# Altium PCB interface-board.PcbDoc
Units mm, origin at the board's own origin, x right, y up, seen from the top; angles counter-clockwise.
Board outline 50 x 50 mm, 2 copper layers (Top Layer, Bottom Layer), stack 1.569 mm thick; 45 components, 35 nets, 147 pads, 411 vias.
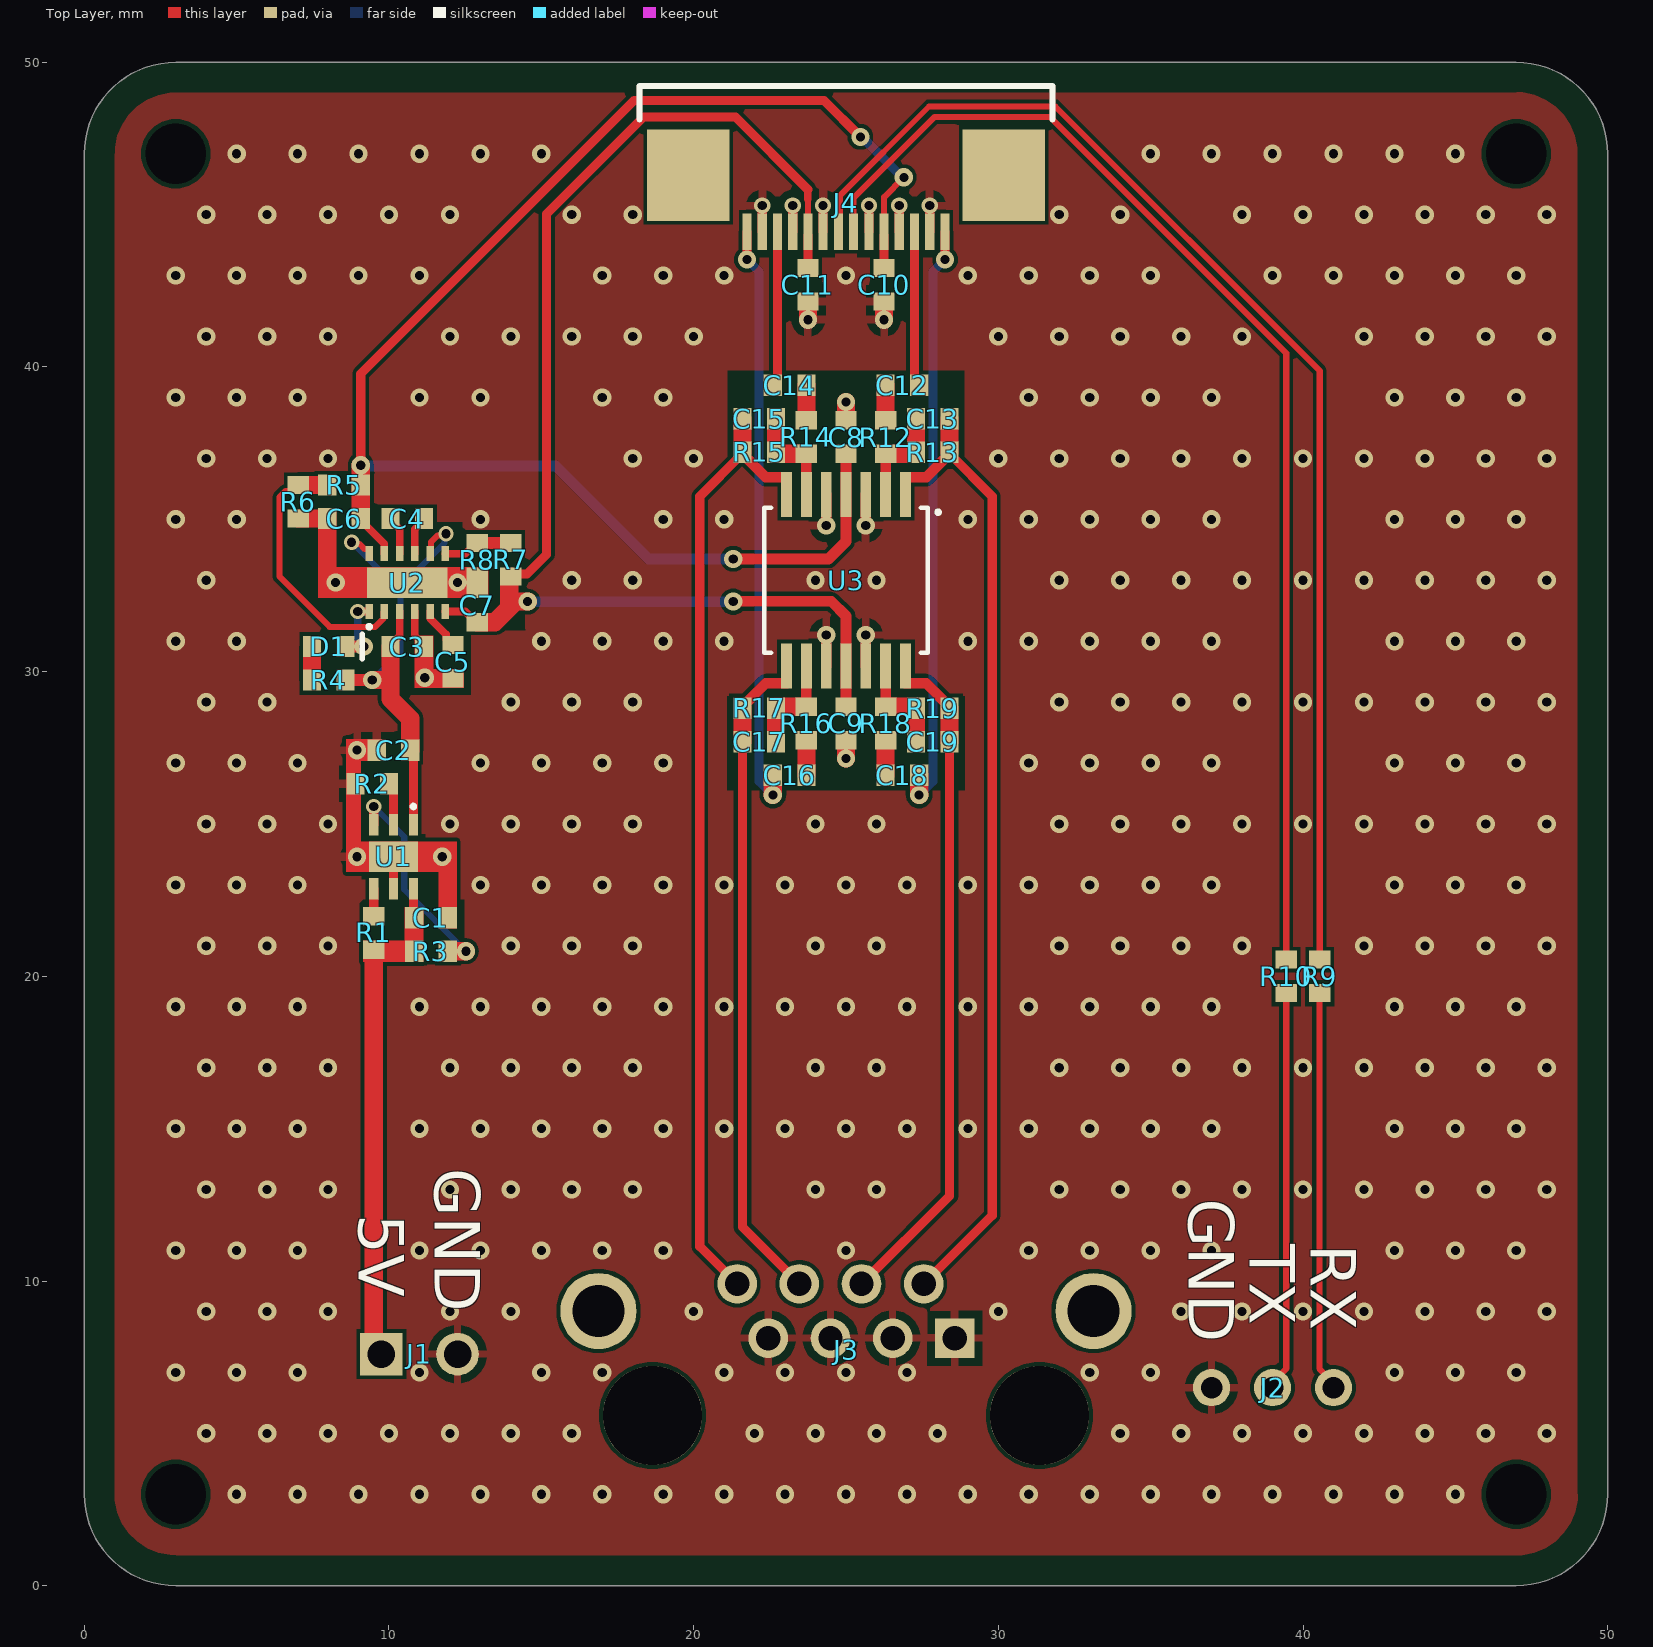
[diagram p0: Top Layer view]
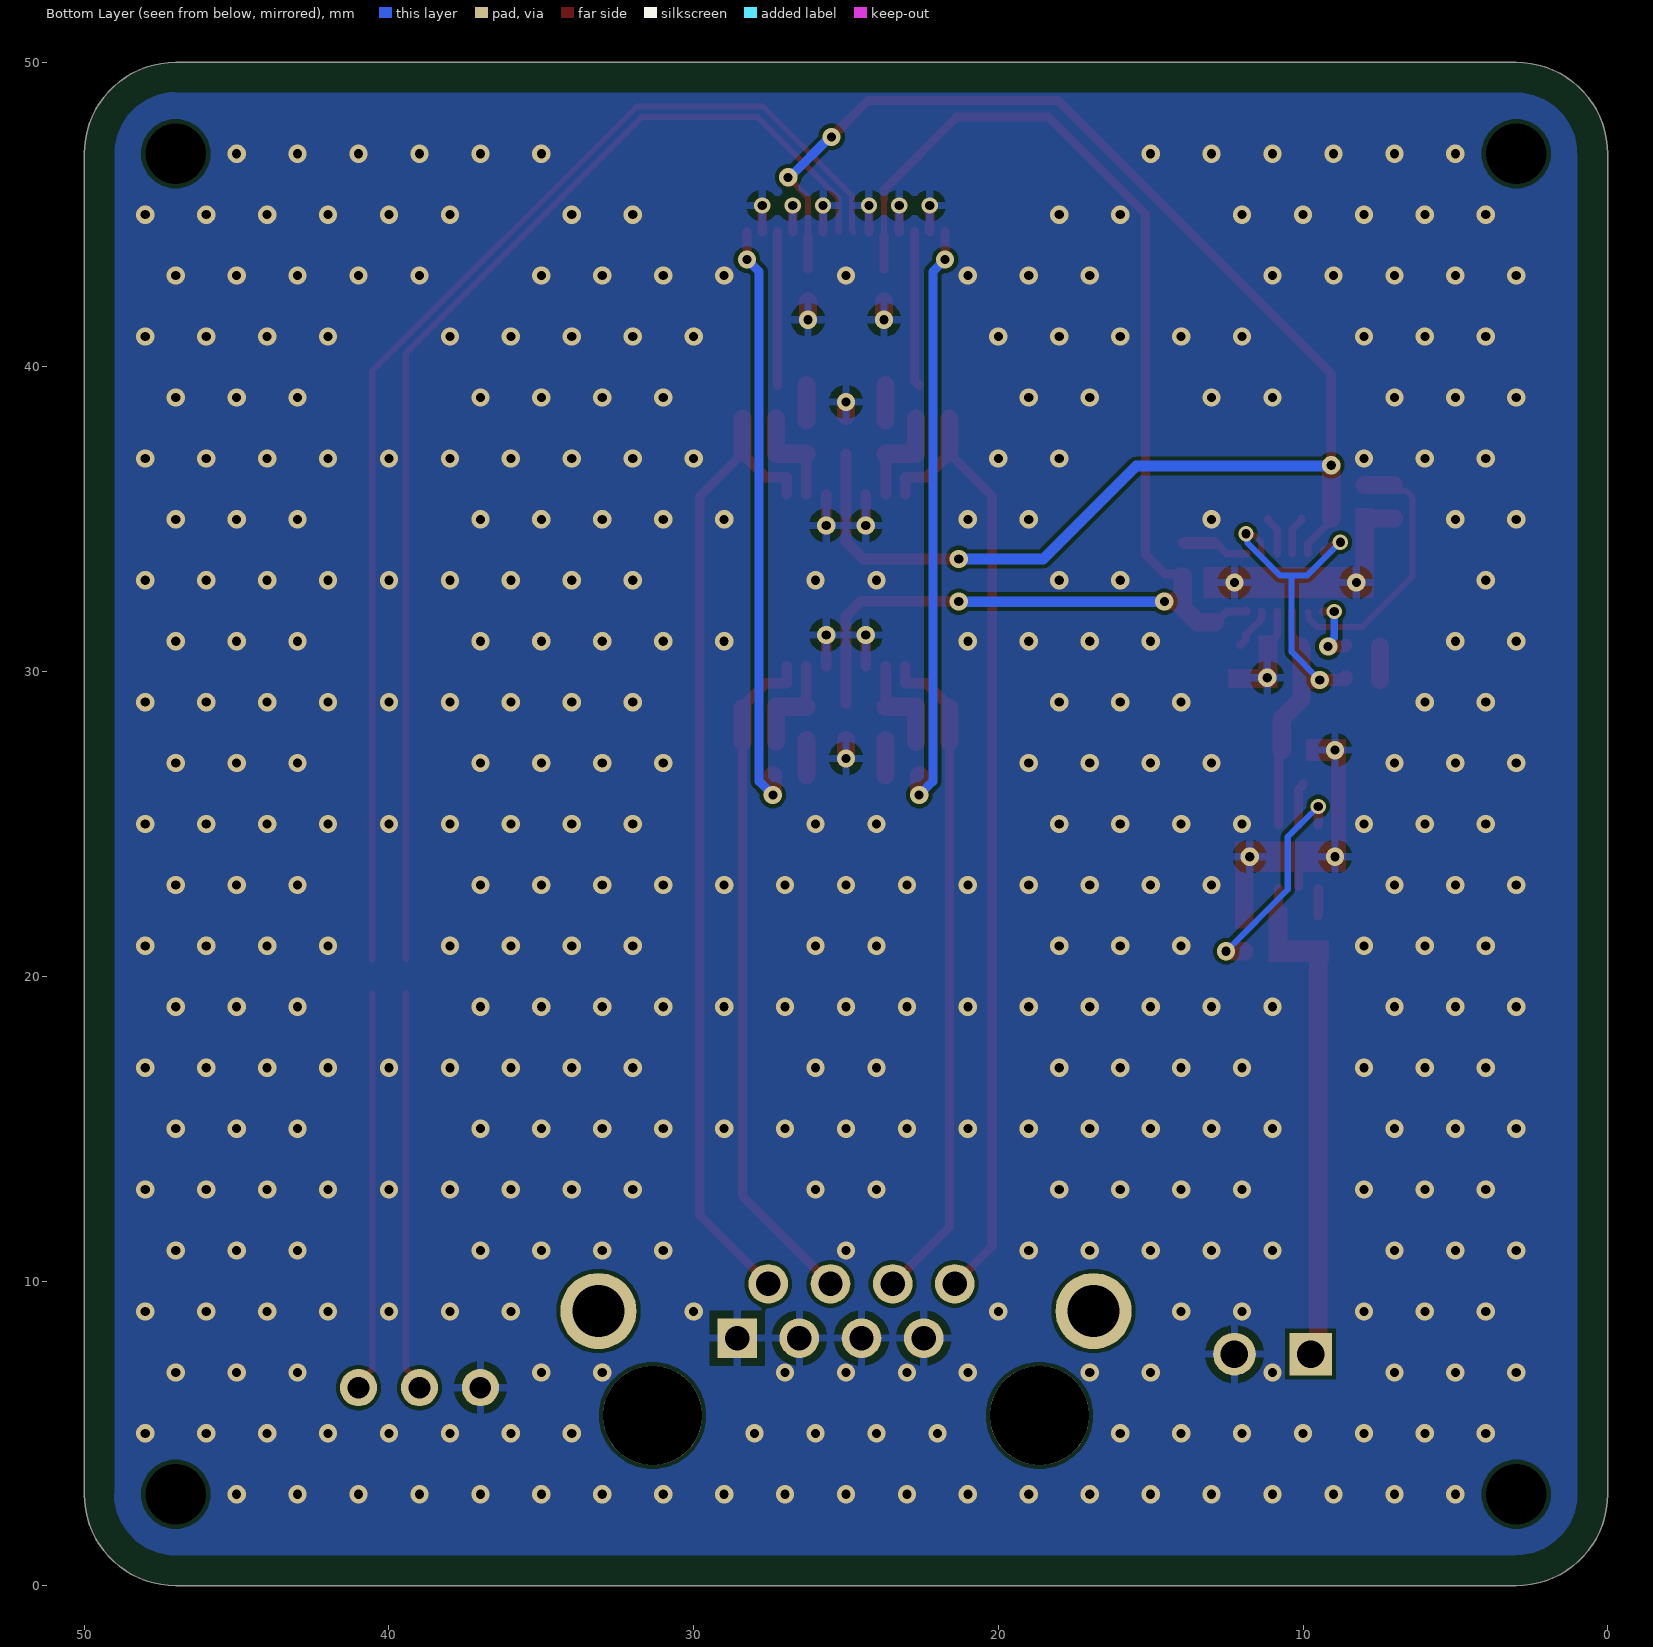
[diagram p1: Bottom Layer view, seen from below]
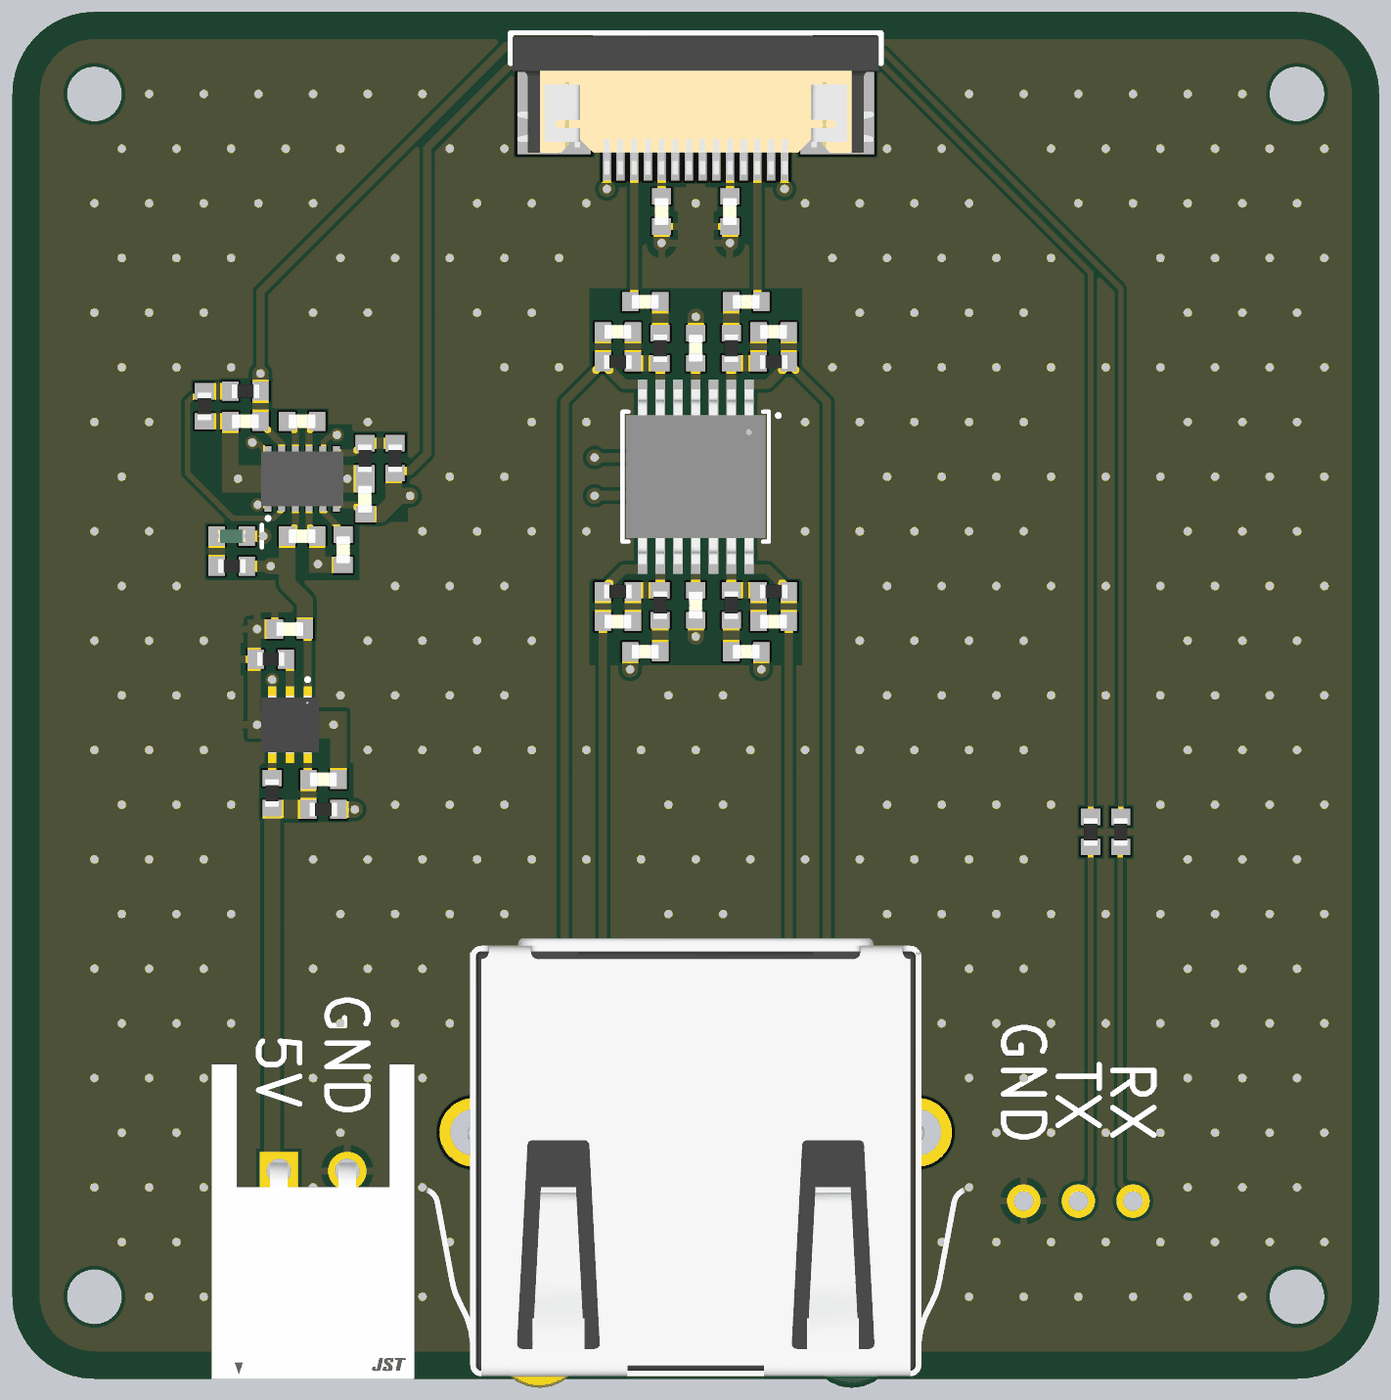
[diagram p2: 3D render of the assembled board from above, using the file's embedded part models]

## Layer stack, top to bottom
Top Solder: solder mask 0.0254, SM-001, Dk 4
Top Layer: signal copper 0.035
Dielectric 1: core 1.4986, Core-043, Dk 4.3
Bottom Layer: signal copper 0.035
Bottom Solder: solder mask 0.0254, SM-001, Dk 4

## Board outline
0,3 0,47 cw(c3,47) 3,50 47,50 cw(c47,47) 50,47 50,3 cw(c47,3) 47,0 3,0 cw(c3,3)

## Design rules (kind name [scope] priority, off if disabled: settings)
Clearance [All] p1: gap=0.127 ignorepadtopadclearanceinfootprint=FALSE
HoleSize [All] p1: absolutevalues=TRUE maxlimit=5 minlimit=0.2 maxpercent=80.000 minpercent=20.000
MinimumSolderMaskSliver [All] p1: minsoldermaskwidth=0.102
PolygonConnect [All] p1: connectstyle=Relief reliefconductorwidth=0.254 reliefentries=4 polygonreliefangle="90 Angle" airgapwidth=0.254
RoutingVias [All] p1: holewidth=0.3 width=0.6 viastyle="Through Hole" minholewidth=0.2 minwidth=0.4 maxholewidth=0.711 maxwidth=1.27
SilkToSilkClearance [All] p1: silktosilkclearance=0.075
SilkToSolderMaskClearance [IsPad] p1: minsilkscreentomaskgap=0.1 clearancetoexposedcopper=TRUE
SolderMaskExpansion SolderMaskExpansion_Via [IsVia] p1: expansion=0.102 istentingtop=TRUE
SolderMaskExpansion [All] p2: expansion=0.102 istentingtop=FALSE
Width [All] p1: maxlimit=0.7 minlimit=0.1 preferedwidth=0.2
26 further rules are at their usual default settings.

## Components (designator, comment, footprint, x,y, rotation, side; value= is the part's Value field where it differs from the comment)
C1 "0u1" CAP_0402 11.375,21.925 r180 top
C2 "2u2" CAP_0402 10.15,27.425 r0 top
C3 "2u2" CAP_0402 10.6,30.825 r180 top
C4 "470n" CAP_0402 10.6,35.025 r0 top
C5 "4u7" CAP_0402 12.1,30.325 r90 top
C6 "2u2" CAP_0402 8.525,35.025 r0 top
C7 "2u2" CAP_0402 12.9,32.175 r90 top
C8 "0u1" CAP_0402 25,37.7 r270 top
C9 "0u1" CAP_0402 25,28.3 r90 top
C10 "2u2" CAP_0402 26.25,42.7 r270 top
C11 "2u2" CAP_0402 23.75,42.7 r270 top
C12 "820n" CAP_0402 26.85,39.4 r180 top
C13 "1p" CAP_0402 27.85,38.3 r180 top
C14 "820n" CAP_0402 23.15,39.4 r0 top
C15 "1p" CAP_0402 22.15,38.3 r0 top
C16 "820n" CAP_0402 23.15,26.6 r0 top
C17 "1p" CAP_0402 22.15,27.7 r0 top
C18 "820n" CAP_0402 26.85,26.6 r180 top
C19 "1p" CAP_0402 27.85,27.7 r180 top
D1 "LED_0402" LED_0402 8.025,30.825 r0 top
J1 "XH_2.54_2P" XH_2.54_2P 11,5.75 r180 top
J2 "PH_2.0_3P" PH_2.0_3P 39,6.5 r0 top
J3 "RJ45" RJ45 25,8 r0 top
J4 "FPC_0.5_14P" FPC_0.5_14P 25,47 r180 top
R1 "300k" RES_0402 9.5,21.425 r270 top
R2 "150k" RES_0402 9.45,26.325 r0 top
R3 "300k" RES_0402 11.375,20.825 r180 top
R4 "20k" RES_0402 8.025,29.725 r0 top
R5 "1.6M" RES_0402 8.525,36.125 r0 top
R6 "510k" RES_0402 7.025,35.575 r90 top
R7 "1.6M" RES_0402 14,33.675 r90 top
R8 "523k" RES_0402 12.9,33.675 r270 top
R9 "22R" RES_0402 40.55,20 r270 top
R10 "22" RES_0402 39.45,20 r270 top
R12 "1k" RES_0402 26.3,37.7 r90 top
R13 "100k" RES_0402 27.85,37.2 r180 top
R14 "1k" RES_0402 23.7,37.7 r90 top
R15 "100k" RES_0402 22.15,37.2 r0 top
R16 "1k" RES_0402 23.7,28.3 r270 top
R17 "100k" RES_0402 22.15,28.8 r0 top
R18 "1k" RES_0402 26.3,28.3 r270 top
R19 "100k" RES_0402 27.85,28.8 r180 top
U1 "TPS25200" TPS25200 10.15,23.925 r270 top
U2 "LM27762" LM27762 10.6,32.925 r90 top
U3 "ADA4084-4" ADA4084-4 25,33 r270 top

## Footprints (in the part's own frame and the unit in brackets; to place one, negate y for a bottom-side part, rotate by r counter-clockwise, add the part's x,y. Pads: shape width x height; smd on the part's side, far side on the other; paste and mask are expansions set on the pad)
ADA4084-4 [mil]
  rect 58x14 smd paste+0 mask+0: 1(-111,76.77) 2(-111,51.18) 3(-111,25.59) 4(-111,0) 5(-111,-25.59) 6(-111,-51.18) 7(-111,-76.77) 8(111,-76.77) 9(111,-51.18) 10(111,-25.59) 11(111,0) 12(111,25.59) 13(111,51.18) 14(111,76.77)
  silkscreen extent -94,-106 94,121, body extent -126,-101 126,101, height 47
CAP_0402 [mm]
  rect 0.6x0.7 smd mask+0.076: 1(-0.55,0) 2(0.55,0)
  body extent -0.5,-0.26 0.5,0.26, height 0.37
FPC_0.5_14P [mm]
  rect 0.3x1.2 smd: 1(-3.25,2.56) 2(-2.75,2.56) 3(-2.25,2.56) 4(-1.75,2.56) 5(-1.25,2.56) 6(-0.75,2.56) 7(-0.25,2.56) 8(0.25,2.56) 9(0.75,2.56) 10(1.25,2.56) 11(1.75,2.56) 12(2.25,2.56) 13(2.75,2.56) 14(3.25,2.56)
  rect 2.7x3 smd: MP1(-5.18,0.7) MP2(5.18,0.7)
  silkscreen extent -6.77,-2.22 6.78,-1.12, body extent -6.7,-2.15 6.7,2.95, height 2.1
LED_0402 [mm]
  rect 0.6x0.7 smd mask+0.076: A(-0.55,0) K(0.55,0)
  silkscreen extent 1.1,-0.4 1.1,0.4, body extent -0.51,-0.25 0.51,0.25, height 0.45
LM27762 [mm]
  rect 0.5x0.25 smd paste+0 mask+0.05: 1(-0.95,1.25) 2(-0.95,0.75) 3(-0.95,0.25) 4(-0.95,-0.25) 5(-0.95,-0.75) 6(-0.95,-1.25) 7(0.95,-1.25) 8(0.95,-0.75) 9(0.95,-0.25) 10(0.95,0.25) 11(0.95,0.75) 12(0.95,1.25)
  rect 1x2.65 smd paste-0.5 mask+0.048: 13(0,0)
  silkscreen extent -1.5,1.2 -1.4,1.3, body extent -1,-1.5 1,1.5, height 0.8
PH_2.0_3P [mil]
  round 48 / inner round 60 / far side round 48 hole 28 paste-24 mask+0: 1(-78.74,0) 2(0,0) 3(78.74,0)
RES_0402 [mm]
  rect 0.6x0.7 smd mask+0.076: 1(-0.55,0) 2(0.55,0)
  body extent -0.5,-0.25 0.5,0.25, height 0.3
RJ45 [mm]
  rect 1.3x1.3 hole 0.8: 1(3.57,0.125)
  round 1.3 hole 0.8: 2(2.55,1.905) 3(1.53,0.125) 4(0.51,1.905) 5(-0.51,0.125) 6(-1.53,1.905) 7(-2.55,0.125) 8(-3.57,1.905)
  round 3.25 hole 3.25 unplated: MH1(-6.35,-2.415) MH2(6.35,-2.415)
  round 2.5 hole 1.7: S1(-8.125,1.015) S2(8.125,1.015)
  body extent -9.88,-8.33 9.88,8.12, height 15.13
TPS25200 [mm]
  rect 0.7x0.3 smd paste-0.15 mask+0: 1(-1.05,0.65) 2(-1.05,0) 3(-1.05,-0.65) 4(1.05,-0.65) 5(1.05,0) 6(1.05,0.65)
  rect 1.016x1.6 smd paste-0.787 mask-0.787: 7(0,0)
  Top Layer region: 0,0.8 0,0.8 0,0.8 0,0.8 0,0.8 0,0.8 0,0.8 0,0.8
  Top Layer region: 0,-0.8 0,-0.8 0,-0.8 0,-0.8 0,-0.8 0,-0.8 0,-0.8 0,-0.8
  silkscreen extent -1.7,0.6 -1.6,0.7, body extent -1.05,-1.05 1.05,1.05, height 0.81
XH_2.54_2P [mm]
  rect 1.4x1.4 hole 0.9 paste-1000 mask+0: 1(1.25,-1.85)
  round 1.4 hole 0.9 paste-1000 mask+0: 2(-1.25,-1.85)
  body extent -3.8,-5.85 3.8,5.85, height 0.25

## Part data
C1 C2 C3 C4 C5 C6 C7 C8 C9 C10 C11 C12 C13 C14 C15 C16 C17 C18 C19: library part CAP_0402, "Capacitor SMD 0402", Voltage=50V
  C1 C8 C9: Capacitance=0u1
  C2 C3 C6 C7 C10 C11: Capacitance=2u2
  C4: Capacitance=470n
  C5: Capacitance=4u7
  C12 C14 C16 C18: Capacitance=820n
  C13 C15 C17 C19: Capacitance=1p
D1: "LED SMD 0402"
J1: "XH, pitch 2.54 mm, 2 pisition"
J2: "PH, pitch 2.0 mm, 3 pisition"
J4: "FPC, Horizontal, pitch 0.5 mm, 14 pins"
R1 R2 R3 R4 R5 R6 R7 R8 R9 R10 R12 R13 R14 R15 R16 R17 R18 R19: library part RES_0402, "Resistor SMD 0402"
  R1 R3: Resistance=300k
  R2: Resistance=150k
  R4: Resistance=20k
  R5 R7: Resistance=1.6M
  R6: Resistance=510k
  R8: Resistance=523k
  R9: Resistance=22R
  R10: Resistance=22
  R12 R14 R16 R18: Resistance=1k
  R13 R15 R17 R19: Resistance=100k
U1: "5-V eFuse With Precision Adjustable Current Limit and Overvoltage Clamp", Manufacturer_Part_Number=TPS25200DRVR, Mfr_Name="Texas Instruments", Copyright="Copyright (C) 2023 Ultra Librarian. All rights reserved.", RefDes=RefDes, Type=DEV
U2: "Low-Noise Positive and Negative Output Integrated Charge Pump Plus LDO", Manufacturer_Part_Number=LM27762DSSR, Mfr_Name="Texas Instruments", Copyright="Copyright (C) 2023 Ultra Librarian. All rights reserved.", Digi-Key_Part_Number_1=296-47331-1-ND, Digi-Key_Part_Number_2=296-47331-2-ND, Digi-Key_Part_Number_3=296-47331-6-ND, Digi-Key_Part_Number_4=2156-LM27762DSSR-ND, RefDes=RefDes, Type=DEV
U3: "30 V, Low Noise, Rail-to-Rail Input/Output, / Low Power Operational Amplifiers"

## Free pads (board coordinates)
  round 1.524 hole 2 unplated: 3(3,3) 3(3,47) 3(47,3) 3(47,47)

## Via types
v1: diameter 0.6, hole 0.3, Top Layer to Bottom Layer, tented both sides, 395 vias
v2: diameter 0.53, hole 0.3, Top Layer to Bottom Layer, tented both sides, 6 vias
v3: diameter 0.6, hole 0.3, Top Layer to Bottom Layer, 6 vias
v4: diameter 0.5, hole 0.3, Top Layer to Bottom Layer, tented both sides, 3 vias
v5: diameter 0.5, hole 0.3, Top Layer to Bottom Layer, 1 vias

## Nets (pads, with @x,y where several pads share a name; then routed paths per layer and width w, separated by ;. In a path a pad name is that pad's centre, name@x,y a point inside that pad or via, vN(x,y) a via of type N, cw(c..) or ccw(c..) an arc to the next point about the centre after c; other vN are vias at no path point)
+5V: C6.2 C8.2 C10.1 J4.5 R5.2 U2.11 U3.4 | length 52.3
  Top Layer w0.2: U2.11@9.84,33.885 U2.11 ; J4.5 26.25,45.575 v1(26.9,46.225)
  Top Layer w0.25: C6.2 9.075,34.975 9.85,34.2 U2.11
  Top Layer w0.3: v1(9.075,36.775) 9.075,39.775 18.05,48.75 24.275,48.75 v1(25.475,47.55) ; C10.1@26.25,43.225 J4.5@26.25,44.315
  Top Layer w0.35: v1(21.3,33.7) 24.425,33.7 25,34.275 U3.4 C8.2
  Top Layer w0.6: C6.2 R5.2 v1(9.075,36.775)
  Bottom Layer w0.2: v1(25.475,47.55) v1@25.525,47.55 ; v1@26.85,46.225 v1(26.9,46.225)
  Bottom Layer w0.3: v1@25.525,47.55 v1@26.85,46.225
  Bottom Layer w0.35: v1(9.075,36.775) 9.1,36.75 15.475,36.75 18.525,33.7 v1(21.3,33.7)
-5V: C7.1 C9.2 C11.1 J4.10 R7.1 U2.6 U3.11 | length 43.9
  Top Layer w0.2: U2.6 U2.6@11.85,32.053 ; R7.1 R7.1@14.083,33.208 ; J4.10@23.75,44.315 23.75,45.5
  Top Layer w0.25: U2.6 12.5,31.975 12.85,31.625 C7.1 ; 23.75,45.5 23.75,45.825
  Top Layer w0.3: R7.1@14.083,33.208 14.533,33.208 15.175,33.85 15.175,45.025 18.35,48.2 21.375,48.2 23.75,45.825 ; C11.1@23.75,43.225 J4.10@23.75,44.315
  Top Layer w0.35: v1(21.3,32.3) 21.31,32.31 24.515,32.31 25,31.825 U3.11 C9.2@25,28.95
  Top Layer w0.6: C7.1 13.475,31.625 13.95,32.1 ; R7.1 13.95,33.125 13.95,32.1 ; v1(14.55,32.3) 14.15,32.3 13.95,32.1
  Bottom Layer w0.35: v1(14.55,32.3) v1(21.3,32.3)
CH1: C19.1 J3.4 R19.1 U3.14 | length 22.5
  Top Layer w0.3: J3.4 28.4,12.795 C19.1
  Top Layer w0.35: U3.14 26.95,29.622 26.953,29.619 27.631,29.619 28.4,28.85 R19.1
  Top Layer w0.6: C19.1 R19.1
CH2: C17.1 J3.6 R17.1 U3.8 | length 22.4
  Top Layer w0.3: C17.1@21.6,28.02 C17.1 21.6,11.775 J3.6
  Top Layer w0.35: R17.1 21.6,28.85 22.369,29.619 23.047,29.619 23.05,29.622 U3.8
  Top Layer w0.6: C17.1 21.6,28.02 R17.1
CH3: C13.1 J3.2 R13.1 U3.1 | length 32.2
  Top Layer w0.3: J3.2 29.8,12.155 29.8,35.75 R13.1@28.4,37.15
  Top Layer w0.35: U3.1 26.95,36.378 26.953,36.381 27.631,36.381 28.4,37.15 R13.1
  Top Layer w0.6: R13.1 C13.1
CH4: C15.1 J3.8 R15.1 U3.7 | length 31.8
  Top Layer w0.2: R15.1@21.6,37.15 R15.1
  Top Layer w0.3: J3.8 20.2,11.135 20.2,35.75 R15.1@21.6,37.15
  Top Layer w0.35: R15.1@21.6,37.15 22.369,36.381 23.047,36.381 23.05,36.378 U3.7
  Top Layer w0.6: R15.1 C15.1
FB+: R5.1 R6.2 U2.2 | length 8.8
  Top Layer w0.2: R6.2 6.825,35.925 6.6,35.925 6.4,35.725 6.4,33.125 8.054,31.471 9.542,31.471 9.825,31.754 9.825,31.95 U2.2
  Top Layer w0.6: R6.2 R5.1
FB-: R7.2 R8.1 U2.7 | length 2.2
  Top Layer w0.25: U2.7 12.5,33.875 12.85,34.225 R8.1
  Top Layer w0.4: R8.1 R7.2@13.9,34.225
GND: C1.1 C2.1 C3.1 C5.1 C6.1 C7.2 C8.1 C9.1 C10.2 C11.2 J1.2 J2.1 J3.1 J3.3 J3.5 J3.7 J4.2 J4.4 J4.6 J4.9 J4.11 J4.13 R2.1 R6.1 R8.2 U1.5 U1.7 U2.4 U2.13 U3.3 U3.5 U3.10 U3.12 | length 14.8
  Top Layer w0.25: U2.4 10.85,31.175 11.15,30.875 C3.1
  Top Layer w0.3: U1.5@10.15,22.95 U1.7 U1.7@10.15,24 ; J4.13 v2(22.25,45.3) ; J4.11 v2(23.25,45.3) ; J4.9 v2(24.25,45.3) ; J4.6 v2(25.75,45.3) ; J4.4 v2(26.75,45.3) ; J4.2 v2(27.75,45.3)
  Top Layer w0.35: U3.10 v1(24.35,31.2) ; v1(24.35,34.8) U3.5 ; U3.12 v1(25.65,31.2) ; v1(25.65,34.8) U3.3
  Top Layer w0.6: R6.1 C6.1 ; v1@7.975,32.9 v1@8,32.875 ; v3(23.75,41.55) C11.2 ; v1(25,27.15) C9.1 ; C8.1@25,38.398 v1(25,38.85) ; v3(26.25,41.55) C10.2
  other v1: 5,3 7,3 9,3 11,3 13,3 15,3 17,3 19,3 21,3 23,3 25,3 27,3 29,3 31,3 33,3 35,3 37,3 39,3 41,3 43,3 45,3 4,5 6,5 8,5 10,5 12,5 14,5 16,5 22,5 24,5 26,5 28,5 34,5 36,5 38,5 40,5 42,5 44,5 46,5 48,5 3,7 5,7 7,7 11,7 15,7 17,7 21,7 23,7 25,7 27,7 33,7 35,7 43,7 45,7 47,7 4,9 6,9 8,9 12,9 14,9 20,9 30,9 36,9 38,9 40,9 42,9 44,9 46,9 48,9 3,11 5,11 7,11 11,11 13,11 15,11 17,11 19,11 25,11 31,11 33,11 35,11 37,11 43,11 45,11 47,11 4,13 6,13 8,13 12,13 14,13 16,13 18,13 24,13 26,13 32,13 34,13 36,13 38,13 40,13 42,13 44,13 46,13 48,13 3,15 5,15 7,15 11,15 13,15 15,15 17,15 19,15 21,15 23,15 25,15 27,15 29,15 31,15 33,15 35,15 37,15 43,15 45,15 47,15 4,17 6,17 8,17 12,17 14,17 16,17 18,17 24,17 26,17 32,17 34,17 36,17 38,17 40,17 42,17 44,17 46,17 48,17 3,19 5,19 7,19 11,19 13,19 15,19 17,19 19,19 21,19 23,19 25,19 27,19 29,19 31,19 33,19 35,19 37,19 43,19 45,19 47,19 4,21 6,21 8,21 14,21 16,21 18,21 24,21 26,21 32,21 34,21 36,21 38,21 42,21 44,21 46,21 48,21 3,23 5,23 7,23 13,23 15,23 17,23 19,23 21,23 23,23 25,23 27,23 29,23 31,23 33,23 35,23 37,23 43,23 45,23 47,23 4,25 6,25 8,25 12,25 14,25 16,25 18,25 24,25 26,25 32,25 34,25 36,25 38,25 40,25 42,25 44,25 46,25 48,25 3,27 5,27 7,27 13,27 15,27 17,27 19,27 31,27 33,27 35,27 37,27 43,27 45,27 47,27 4,29 6,29 14,29 16,29 18,29 32,29 34,29 36,29 38,29 40,29 42,29 44,29 46,29 48,29 11.175,29.8 3,31 5,31 15,31 17,31 19,31 21,31 29,31 31,31 33,31 35,31 37,31 43,31 45,31 47,31 8.25,32.925 12.25,32.925 4,33 16,33 18,33 24,33 26,33 32,33 34,33 36,33 38,33 40,33 42,33 44,33 46,33 48,33 3,35 5,35 13,35 19,35 21,35 29,35 31,35 33,35 35,35 37,35 43,35 45,35 47,35 4,37 6,37 8,37 18,37 20,37 30,37 32,37 34,37 36,37 38,37 40,37 42,37 44,37 46,37 48,37 3,39 5,39 7,39 11,39 13,39 17,39 19,39 31,39 33,39 35,39 37,39 43,39 45,39 47,39 4,41 6,41 8,41 12,41 14,41 16,41 18,41 20,41 30,41 32,41 34,41 36,41 38,41 42,41 44,41 46,41 48,41 3,43 5,43 7,43 9,43 11,43 17,43 19,43 21,43 25,43 29,43 31,43 33,43 35,43 39,43 41,43 43,43 45,43 47,43 4,45 6,45 8,45 10,45 12,45 16,45 18,45 32,45 34,45 38,45 40,45 42,45 44,45 46,45 48,45 5,47 7,47 9,47 11,47 13,47 15,47 35,47 37,47 39,47 41,47 43,47 45,47
  other v3: 8.95,23.925 11.75,23.925 8.95,27.425
NetC4_1: C4.1 U2.10 | length 1.3
  Top Layer w0.25: C4.1 10.05,34.975 10.35,34.675 U2.10
NetC4_2: C4.2 U2.9 | length 1.3
  Top Layer w0.25: U2.9 10.85,34.675 11.15,34.975 C4.2
NetC5_2: C5.2 U2.5 | length 1.4
  Top Layer w0.25: U2.5 11.35,31.744 11.875,31.219 11.875,31.05 12.05,30.875 C5.2@12.075,30.875
NetC12_2: C12.2 R12.2 | length 1.2
  Top Layer w0.6: R12.2 C12.2
NetC13_2: C13.2 R12.1 R13.2 U3.2 | length 3.5
  Top Layer w0.35: U3.2 R12.1
  Top Layer w0.6: R12.1 27.3,37.15 R13.2 C13.2
NetC14_2: C14.2 R14.2 | length 1.2
  Top Layer w0.6: R14.2 C14.2
NetC15_2: C15.2 R14.1 R15.2 U3.6 | length 3.5
  Top Layer w0.35: U3.6 R14.1
  Top Layer w0.6: C15.2 R15.2 22.7,37.15 R14.1
NetC16_2: C16.2 R16.2 | length 1.2
  Top Layer w0.6: C16.2 23.7,26.65 R16.2
NetC17_2: C17.2 R16.1 R17.2 U3.9 | length 3.5
  Top Layer w0.35: R16.1 U3.9
  Top Layer w0.6: C17.2 22.7,28.85 R16.1
NetC18_2: C18.2 R18.2 | length 1.2
  Top Layer w0.6: C18.2 R18.2
NetC19_2: C19.2 R18.1 R19.2 U3.13 | length 3.5
  Top Layer w0.35: R18.1 U3.13
  Top Layer w0.6: R18.1 27.3,28.85 R19.2 C19.2
NetD1_A: D1.A R4.1 | length 1.1
  Top Layer w0.6: R4.1 D1.A
NetD1_K: D1.K U2.1 | length 2.2
  Top Layer w0.25: v4(8.975,31.975) U2.1 U2.1@9.35,31.986
  Top Layer w0.4: D1.K@8.575,30.875 8.625,30.825 v1(9.175,30.825)
  Bottom Layer w0.25: v4(8.975,31.975) 8.975,31.12 9.175,30.92 v1(9.175,30.825)
NetJ2_2: J2.2 R10.2 | length 13.1
  Top Layer w0.2: J2.2 39,6.677 39.45,7.127 R10.2
NetJ2_3: J2.3 R9.2 | length 13.1
  Top Layer w0.2: R9.2@40.54,19.44 40.54,7.127 41,6.666 J2.3
NetR1_1: R1.1 U1.4 | length 0.9
  Top Layer w0.3: R1.1 U1.4
NetR2_2: R2.2 U1.2 | length 1.4
  Top Layer w0.3: R2.2 10,26.275 10.15,26.125 U1.2
NetR3_1: R3.1 U1.3 | length 7.2
  Top Layer w0.3: U1.3 v5(9.5,25.575)
  Top Layer w0.6: R3.1 v3(12.525,20.825)
  Bottom Layer w0.2: v5(9.5,25.575) 10.5,24.575 10.5,22.85 v3(12.525,20.825)
SIG1: C18.1 J4.1 | length 19.5
  Top Layer w0.3: v1(28.25,43.525) J4.1
  Top Layer w0.6: v1(27.4,25.95) C18.1
  Bottom Layer w0.3: v1(27.4,25.95) 27.85,26.4 27.85,43.125 v1(28.25,43.525)
SIG2: C16.1 J4.14 | length 19.5
  Top Layer w0.3: v1(21.75,43.525) J4.14
  Top Layer w0.6: v1(22.6,25.95) C16.1
  Bottom Layer w0.3: v1(21.75,43.525) 22.15,43.125 22.15,26.4 v1(22.6,25.95)
SIG3: C12.1 J4.3 | length 5
  Top Layer w0.3: C12.1@27.25,39.4 J4.3
SIG4: C14.1 J4.12 | length 5.1
  Top Layer w0.3: C14.1 22.75,39.55 J4.12
UART_RX: J4.8 R9.1 | length 41.1
  Top Layer w0.2: J4.8 24.8,44.49 24.8,45.105 24.802,45.106 24.802,45.627 27.725,48.55 31.875,48.55 40.55,39.875 R9.1
UART_TX: J4.7 R10.1 | length 39.5
  Top Layer w0.2: J4.7 25.25,45.55 27.9,48.2 31.7,48.2 39.45,40.45 R10.1
Vclamp: C2.2 C3.2 R4.2 U1.1 U2.3 U2.8 U2.12 | length 18.6
  Top Layer w0.2: v4(8.775,34.25) 8.832,34.193 9.032,34.193 9.2,34.025 9.325,34.025 9.35,34 U2.12 ; U2.8 11.375,33.9 11.375,34.252 11.591,34.468 11.818,34.468 v4(11.875,34.525)
  Top Layer w0.25: C3.2@10.05,30.875 10.35,31.175 U2.3
  Top Layer w0.3: U1.1 C2.2@10.8,27.325
  Top Layer w0.4: R4.2 v1(9.45,29.725)
  Top Layer w0.43: R4.2@8.575,29.825 R4.2@8.587,29.837
  Top Layer w0.6: v1(9.45,29.725) 10.05,29.725 ; C3.2 10.05,29.725 ; C2.2 10.7,28.45 10.05,29.1 10.05,29.725
  Bottom Layer w0.2: v4(8.775,34.25) 9.875,33.15 10.375,33.15 ; v1(9.45,29.725) 10.375,30.65 10.375,33.15 ; v4(11.875,34.525) 11.818,34.468 11.818,34.218 10.75,33.15 10.375,33.15
Vin: C1.2 J1.1 R1.2 R3.2 U1.6 | length 14.3
  Top Layer w0.3: U1.6 10.8,21.95 C1.2
  Top Layer w0.6: R1.2 9.5,7.85 J1.1
pads on no net: J3.MH1 J3.MH2 J3.S1 J3.S2 J4.MP1 J4.MP2

## Polygon pours and split planes (outlines as drawn)
GND on Bottom Layer "GND_L02_P004" (solid, pour order 4): 1,3 ccw(c3,3.011) 3,1 47,1 ccw(c47,3.011) 49,3 49,47 ccw(c47,47.011) 47,49 3,49 ccw(c3,47.011) 1,47
GND on Top Layer "GND_L01_P005" (solid, pour order 5): 1,3 ccw(c3,3.011) 3,1 47,1 ccw(c47,3.011) 49,3 49,47 ccw(c47,47.011) 47,49 3,49 ccw(c3,47.011) 1,47

## Other copper
Top Layer:
  rectangle net GND: 7.675,32.425 8.275,35.375
  pour cut-out: 21.1,29.2 28.9,29.2 28.9,26.1 21.1,26.1
  pour cut-out: 21.1,39.9 28.9,39.9 28.9,36.8 21.1,36.8
  region net GND: 13.25,33.425 7.675,33.425 7.675,32.425 13.25,32.425
  pour cut-out: 9.023,22.402 9.023,20.485 9.013,20.475 9.053,20.435 9.053,20.378 12.322,20.378 12.352,20.348 12.479,20.475 12.479,22.529 9.15,22.529
  pour cut-out: 11.577,34.926 12.424,34.926 12.425,34.925 12.423,34.923 12.423,34.161 11.714,34.161 11.577,34.298
  pour cut-out: 9.623,35.502 11.577,35.502 11.577,34.926 9.551,34.926 9.55,34.925 9.51,34.965 9.51,35.537
  pour cut-out: 8.402,36.602 9.473,36.602 9.55,36.525 9.51,36.485 9.51,35.537 8.513,35.537 8.402,35.648
  pour cut-out: 14.477,34.652 12.423,34.652 12.425,34.65 12.425,31.35 14.475,31.35 14.5,31.375 14.477,31.398
  pour cut-out: 7.048,31.302 7.048,29.248 7.075,29.221 12.704,29.221 12.704,31.271 12.673,31.302
  region net GND: 11.45,31.175 11.45,30.075 12.45,30.075 12.45,29.475 10.85,29.475 10.85,31.175
  region net GND: 12.225,21.575 12.225,24.425 8.6,24.425 8.6,23.425 11.625,23.425 11.625,21.575
  region net Vin: 11.125,22.275 10.525,22.275 10.525,21.175 9.15,21.175 9.15,20.475 11.125,20.475
  region net GND: 9.9,27.775 8.6,27.775 8.6,24.4 9.075,24.4 9.075,27.075 9.9,27.075

## Silkscreen, mask and mechanical layers (free items; w line width, h text height)
Top Overlay:
  text "GND" at 11.5,13.699 h1.5 r270
  text "GND" at 36.25,12.699 h1.5 r270
  text "5V" at 9,12.199 h1.5 r270
  text "TX" at 38.25,11.199 h1.5 r270
  text "RX" at 40.25,11.199 h1.5 r270

## Text inside footprints (layer, text, board x,y; h text height)
U3: Mechanical 13 "*" at 26.207,35.184 h1.27 r270